# Altium PCB MAIN.PcbDoc
Units mil, origin at the board's own origin, x right, y up, seen from the top; angles counter-clockwise.
Board outline 3703.24 x 3436.36 mil, 4 copper layers (Top Layer, PWR plane, GND plane, Bottom Layer), stack 53.956 mil thick; 27 components, 25 nets, 89 pads, 24 vias.
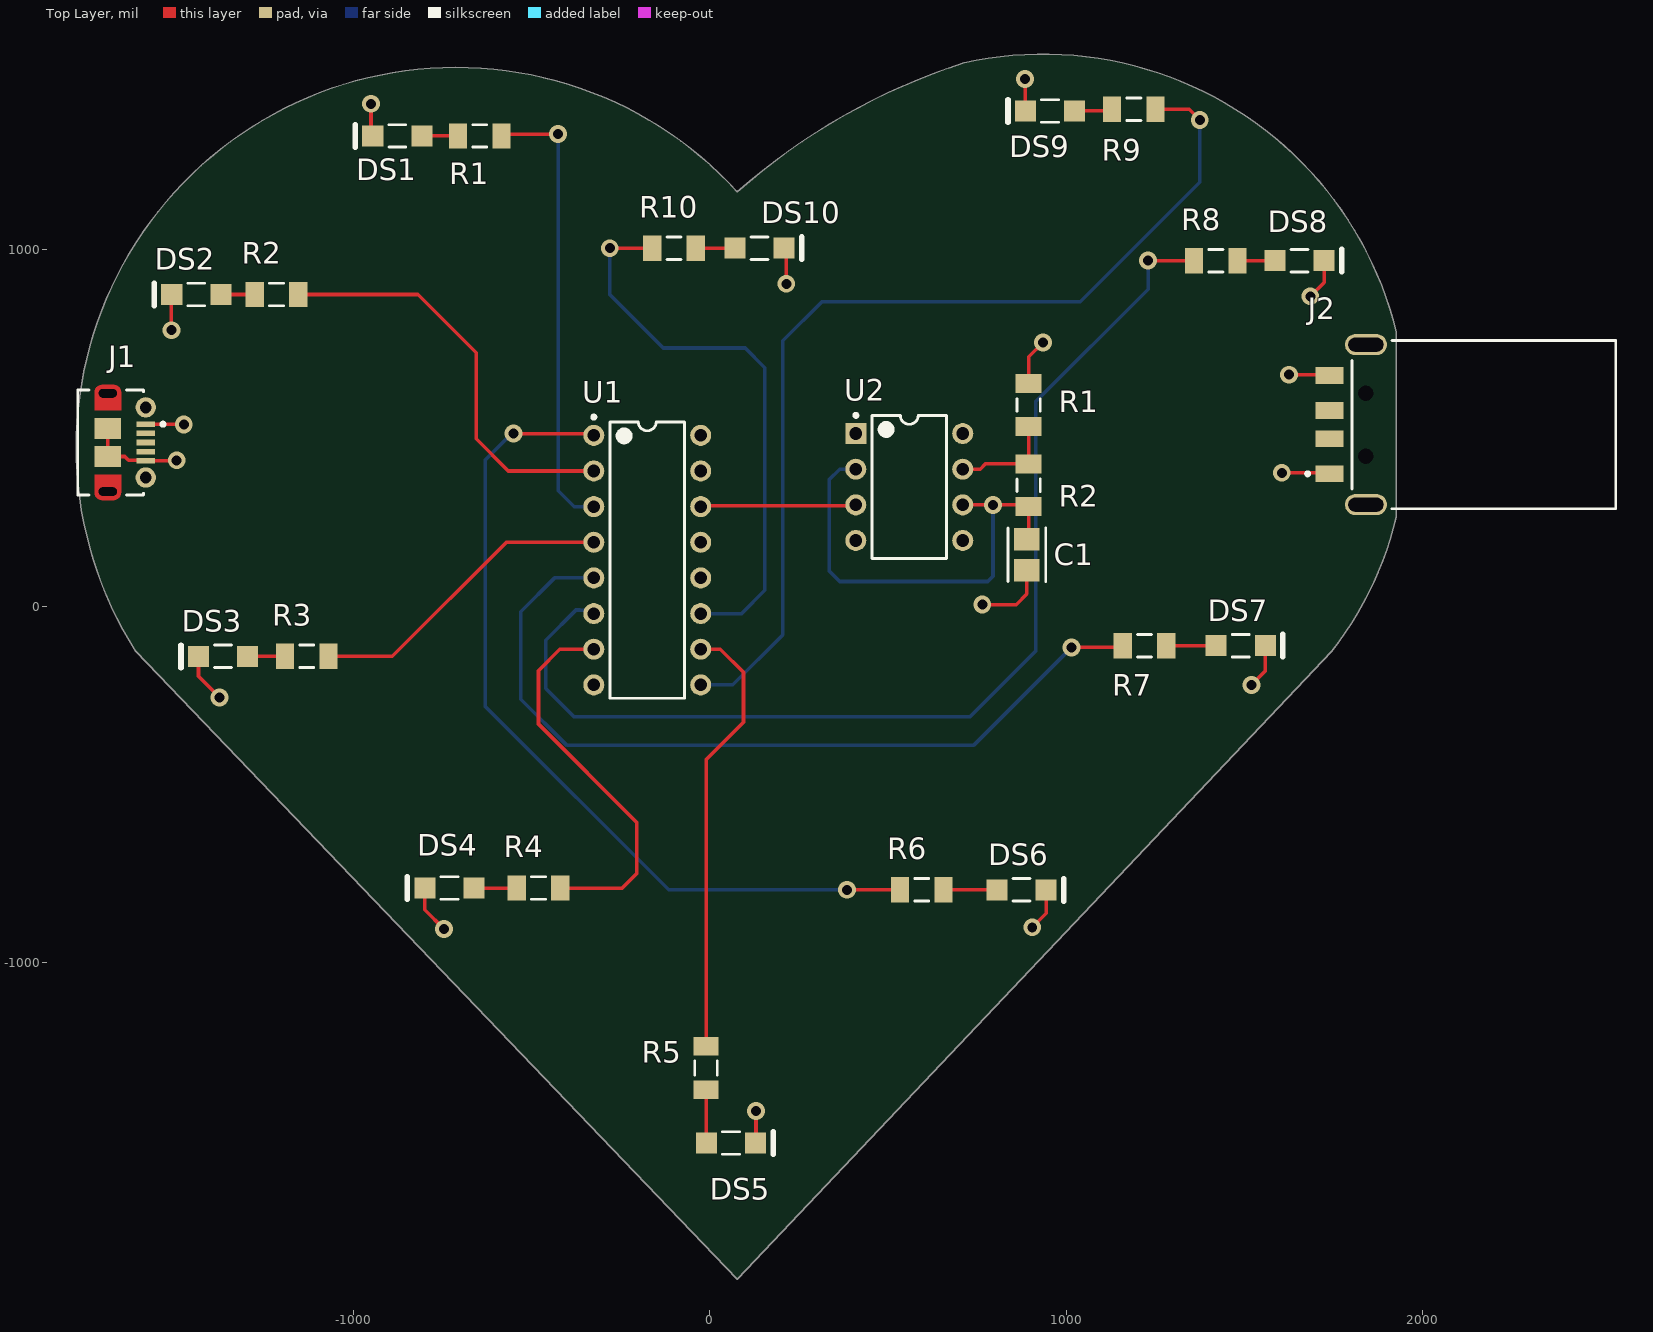
[diagram p0: Top Layer view]
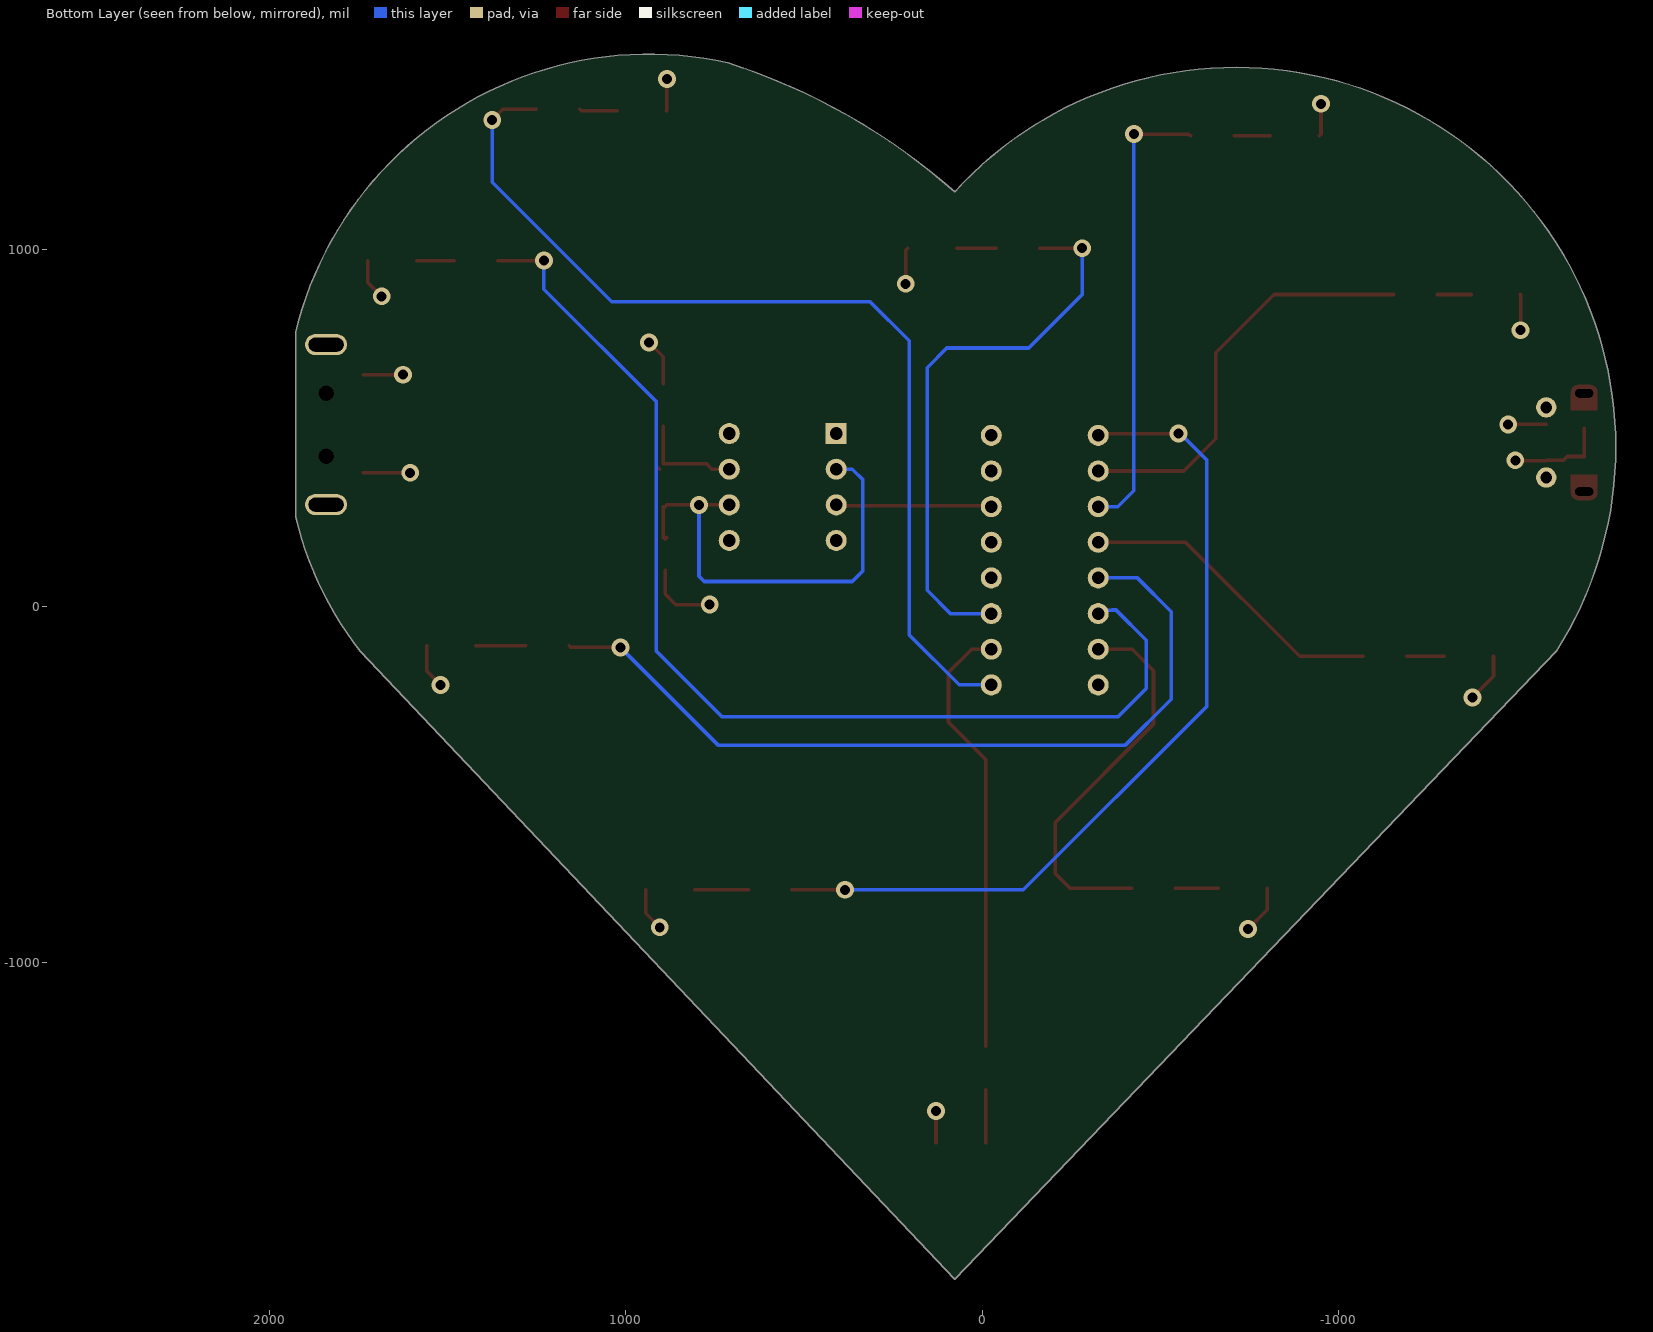
[diagram p1: Bottom Layer view, seen from below]
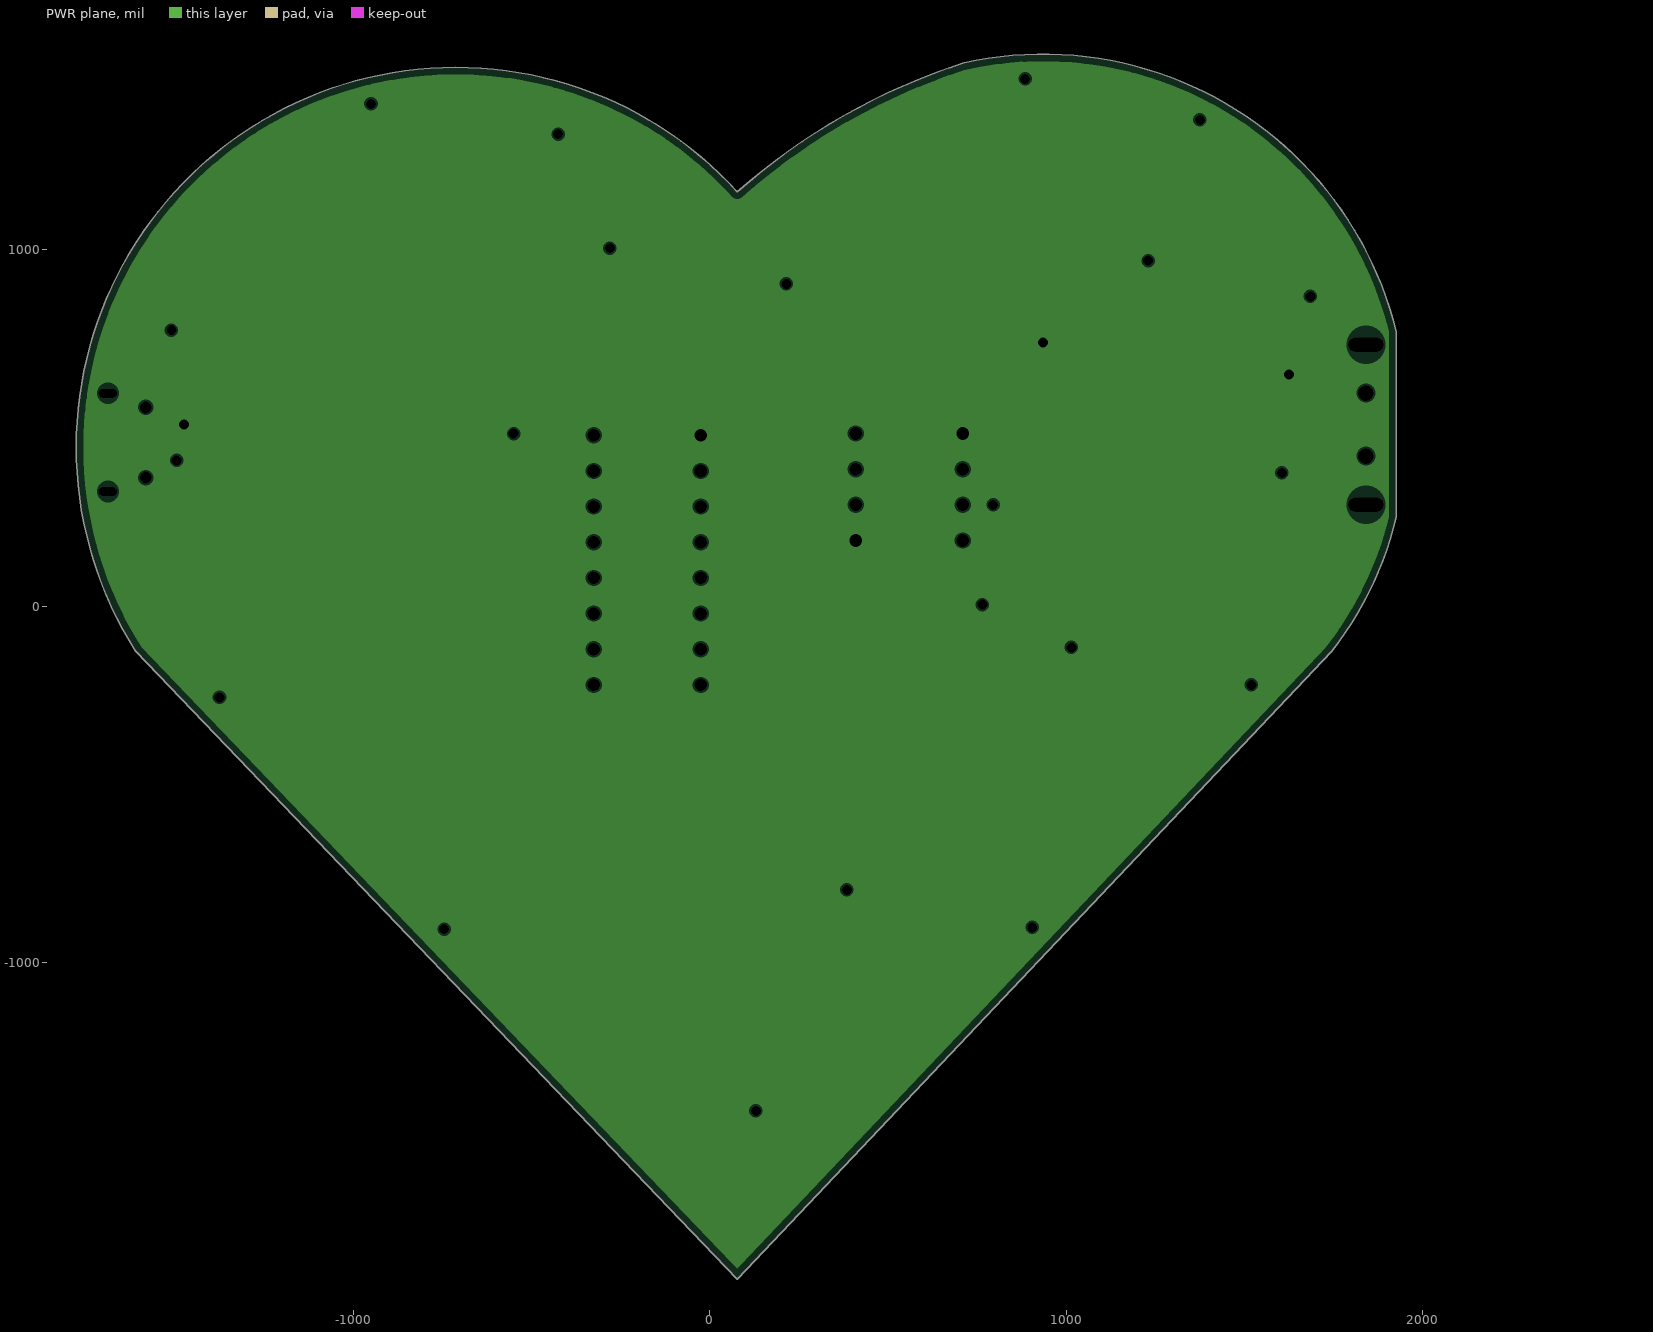
[diagram p2: PWR plane, clearances drawn from the general rule]
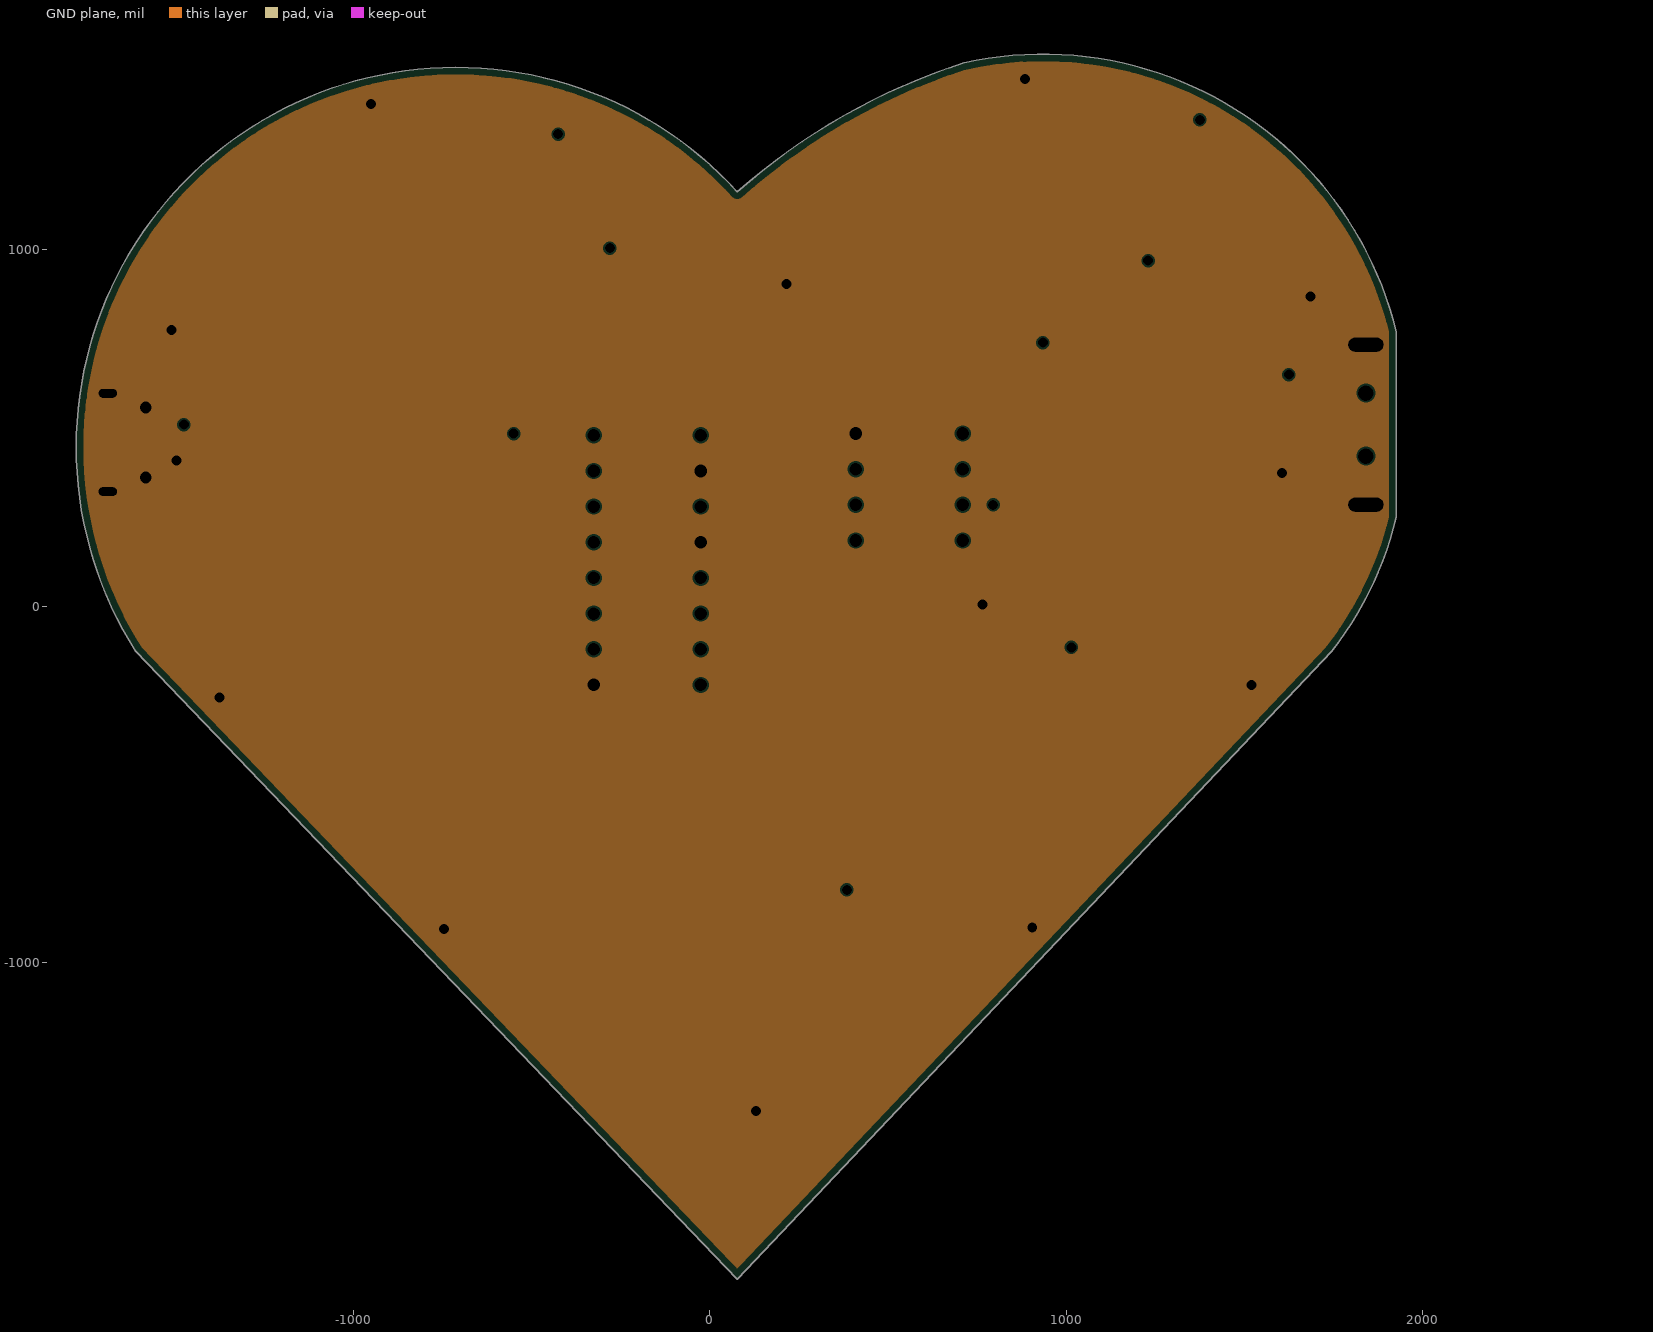
[diagram p3: GND plane, clearances drawn from the general rule]

## Layer stack, top to bottom
Top Solder: solder mask 0.4, Solder Resist, Dk 3.5
Top Layer: signal copper 1.4
Dielectric 2: prepreg 10.2, PP-006, Dk 4.1
PWR plane: plane copper 1.378, net +5
Dielectric 1: dielectric 28, FR-4, Dk 4.8
GND plane: plane copper 1.378, net GND
Dielectric 3: prepreg 10.2, PP-006, Dk 4.1
Bottom Layer: signal copper 1.4
Bottom Solder: solder mask 0.4, Solder Resist, Dk 3.5

## Board outline
1926.36,769.92 1926.36,250.67 cw(c953.75,486.38) 1745.46,-125.77 77.55,-1887.25 -1610,-125.77 cw(c-711.36,446.75) 77.55,1162.95 cw(c1255.47,-167.24) 713.97,1525 cw(c935.04,529.08)

## Design rules (kind name [scope] priority, off if disabled: settings)
BoardOutlineClearance [All] p1: gap=7.87 ignorepadtopadclearanceinfootprint=FALSE
Clearance [All] p1: gap=5 ignorepadtopadclearanceinfootprint=FALSE except(9.84: Arc-Hole Track-Hole SMDPad-Hole THPad-Hole Via-Hole Fill-Hole Poly-Hole Region-Hole Text-Hole)
ComponentClearance [All] p1: gap=5 collisioncheckmode=3 verticalgap=5 showdistances=TRUE
DiffPairsRouting [All] p1: maxlimit=10 minlimit=5 mostfreqgap=5 toplayer_minwidth=5 toplayer_maxwidth=1000 toplayer_prefwidth=5 bottomlayer_minwidth=5 bottomlayer_maxwidth=1000 bottomlayer_prefwidth=5 maxuncoupledlength=500
Height [All] p1: minheight=0 maxheight=71497.94 prefheight=500
HoleSize [All] p1: absolutevalues=TRUE maxlimit=248.03 minlimit=11.81 maxpercent=80.000 minpercent=20.000
HoleToHoleClearance [All] p1: gap=9.84 allowstackedmicrovias=FALSE
MinimumAnnularRing [All] p1: minimumring=3
MinimumSolderMaskSliver [All] p1: minsoldermaskwidth=0
PlaneClearance [All] p1: clearance=5
PlaneConnect PlaneConnectPowerPads [InPadClass('PowerPads')] p1: planeconnectstyle=Relief reliefexpansion=20 reliefentries=4 reliefconductorwidth=10 reliefairgap=10
PlaneConnect [All] p2: planeconnectstyle=Relief reliefexpansion=11.81 reliefentries=4 reliefconductorwidth=10 reliefairgap=10
PolygonConnect PolygonConnectPowerPads [All vs (InPadClass('PowerPads'))] p1: connectstyle=Direct reliefconductorwidth=10 reliefentries=4 polygonreliefangle="90 Angle" airgapwidth=10
PolygonConnect [All] p2: thpad.connectstyle=Relief thpad.reliefconductorwidth=5 thpad.reliefentries=4 thpad.polygonreliefangle="90 Angle" thpad.airgapwidth=5 smdpad.connectstyle=Relief smdpad.reliefconductorwidth=5 smdpad.reliefentries=4 smdpad.polygonreliefangle="90 Angle" smdpad.airgapwidth=5 via.connectstyle=Direct via.reliefconductorwidth=5 via.reliefentries=4 via.polygonreliefangle="90 Angle" via.airgapwidth=5
RoutingVias [All] p1: holewidth=11.81 width=23.62 viastyle="Through Hole" minholewidth=11.81 minwidth=23.62 maxholewidth=23.62 maxwidth=259.84
SilkToSilkClearance [All] p1: silktosilkclearance=0
SilkToSolderMaskClearance [IsPad] p1: minsilkscreentomaskgap=5 clearancetoexposedcopper=TRUE
SolderMaskExpansion [All] p1: expansion=2.95 istentingtop=FALSE
Width [All] p1: maxlimit=1000 minlimit=5 preferedwidth=5 minimp=50.000000 maximp=50.000000 favimp=50.000000
20 further rules are at their usual default settings.

## Classes and differential pairs
channel class LED: Designator1 Designator2 Designator3 Designator4 Designator5 Designator6 Designator7 Designator8 Designator9 Designator10
component class MAIN: C1 J1 R1 R2 U1 U2
component class Designator10: DS10 R10
component class Designator9: DS9 R9
component class Designator8: DS8 R8
component class Designator7: DS7 R7
component class Designator6: DS6 R6
component class Designator5: DS5 R5
component class Designator4: DS4 R4
component class Designator3: DS3 R3
component class Designator2: DS2
component class Designator1: DS1

## Components (designator, comment, footprint, x,y, rotation, side; value= is the part's Value field where it differs from the comment)
C1 "C3216X5R1A107M160AC" FP-C3216-160-0_3-IPC_C 890,145 r270 top
DS1 "HSMH-C150" AVAG-HSMX-C150_V -876.1,1320 r180 top (schematic designator DS?)
DS2 "HSMH-C150" AVAG-HSMX-C150_V -1440,875 r180 top (schematic designator DS?)
DS3 "HSMH-C150" AVAG-HSMX-C150_V -1365,-140 r180 top (schematic designator DS?)
DS4 "HSMH-C150" AVAG-HSMX-C150_V -730,-790 r180 top (schematic designator DS?)
DS5 "HSMH-C150" AVAG-HSMX-C150_V 60,-1505 r0 top (schematic designator DS?)
DS6 "HSMH-C150" AVAG-HSMX-C150_V 875,-795 r0 top (schematic designator DS?)
DS7 "HSMH-C150" AVAG-HSMX-C150_V 1490,-110 r0 top (schematic designator DS?)
DS8 "HSMH-C150" AVAG-HSMX-C150_V 1655,970 r0 top (schematic designator DS?)
DS9 "HSMH-C150" AVAG-HSMX-C150_V 955,1390 r180 top (schematic designator DS?)
DS10 "HSMH-C150" AVAG-HSMX-C150_V 140,1005 r0 top (schematic designator DS?)
J1 "105017-0001" USB-MICRO-B_V -1635,460 r270 top
J2 "Male USB 2.0 Connector (fixed)" MOLX-480-37-1000_V 1790,510 r90 top
R1 "CRCW1206220RFKEA" RESC3216X60X45ML10T20 -645,1320 r180 top (schematic designator R?)
R1 "CRCW12061K00FKEA" RESC3216X60X45ML15T20 895,565 r90 top (schematic designator R1?)
R2 "CRCW12061K00FKEA" RESC3216X60X45ML15T20 895,340 r90 top (schematic designator R2?)
R2 "CRCW1206220RFKEA" RESC3216X60X45ML10T20 -1215,875 r180 top (schematic designator R?)
R3 "CRCW1206220RFKEA" RESC3216X60X45ML10T20 -1130,-140 r180 top (schematic designator R?)
R4 "CRCW1206220RFKEA" RESC3216X60X45ML10T20 -480,-790 r180 top (schematic designator R?)
R5 "CRCW1206220RFKEA" RESC3216X60X45ML10T20 -10,-1295 r270 top (schematic designator R?)
R6 "CRCW1206220RFKEA" RESC3216X60X45ML10T20 595,-795 r0 top (schematic designator R?)
R7 "CRCW1206220RFKEA" RESC3216X60X45ML10T20 1220,-110 r0 top (schematic designator R?)
R8 "CRCW1206220RFKEA" RESC3216X60X45ML10T20 1420.08,970 r0 top (schematic designator R?)
R9 "CRCW1206220RFKEA" RESC3216X60X45ML10T20 1190,1395 r180 top (schematic designator R?)
R10 "CRCW1206220RFKEA" RESC3216X60X45ML10T20 -100,1005 r0 top (schematic designator R?)
U1 "CD4017BE" N0016A -175,130 r0 top (schematic designator U1?)
U2 "NE555P" P0008A 560,335 r0 top (schematic designator U?)

## Footprints (in the part's own frame and the unit in brackets; to place one, negate y for a bottom-side part, rotate by r counter-clockwise, add the part's x,y. Pads: shape width x height; smd on the part's side, far side on the other; paste and mask are expansions set on the pad)
AVAG-HSMX-C150_V [mm] "SMD, 2-Leads, Body 3.2x1.6mm"
  rect 1.5x1.5 smd: 1(-1.75,0) 2(1.75,0)
  silkscreen extent -0.6,-0.8 3,0.8, body extent -1.6,-0.8 1.6,0.8, height 1.1
FP-C3216-160-0_3-IPC_C [mil]
  rect 63.15x71.11 smd paste+0 mask+0: 1(-43.35,0) 2(43.35,0)
  silkscreen extent -75,-53 75,53, body extent -79,-41 79,41, height 10
MOLX-480-37-1000_V [mm] "CONN, 4-Leads, Body 12x18.8mm"
  rect 1.2x2 smd: 1(-3.5,1.3) 2(-1,1.3) 3(1,1.3) 4(3.5,1.3)
  oval 1.5x3 hole 1 slot 2.5 at 90 deg: 5(-5.7,-1.3) 6(5.7,-1.3)
  round 0.5 hole 1.1 unplated: MH1(-2.25,-1.3) MH2(2.25,-1.3)
  silkscreen extent -6,-19.1 6,2.97, body extent -6.35,-19.08 6.35,2.2, height 3.07
N0016A [mm] "DIP, 16-Leads, Body 19.7x6.6mm, Pitch 2.54mm"
  round 1.5 hole 0.9: 1(-3.81,8.89) 2(-3.81,6.35) 3(-3.81,3.81) 4(-3.81,1.27) 5(-3.81,-1.27) 6(-3.81,-3.81) 7(-3.81,-6.35) 8(-3.81,-8.89) 9(3.81,-8.89) 10(3.81,-6.35) 11(3.81,-3.81) 12(3.81,-1.27) 13(3.81,1.27) 14(3.81,3.81) 15(3.81,6.35) 16(3.81,8.89)
  silkscreen extent -3.93,-9.85 2.65,10.31, body extent -3.95,-9.85 3.95,9.85, height 5.08
P0008A [mm] "DIP, 8-Leads, Body 10.15x6.6mm, Pitch 2.54mm"
  rect 1.5x1.5 hole 0.9: 1(-3.81,3.81)
  round 1.5 hole 0.9: 2(-3.81,1.27) 3(-3.81,-1.27) 4(-3.81,-3.81) 5(3.81,-3.81) 6(3.81,-1.27) 7(3.81,1.27) 8(3.81,3.81)
  silkscreen extent -3.93,-5.1 2.65,5.23, body extent -3.95,-5.07 3.95,5.07, height 5.08
RESC3216X60X45ML10T20 [mm] "Chip Resistor, 2-Leads, Body 3.20x1.60mm, IPC Low Density"
  rect 1.3x1.8 smd: 1(-1.55,0) 2(1.55,0)
  silkscreen extent -0.5,-0.8 0.5,0.8, body extent -1.65,-0.85 1.65,0.85, height 0.6
RESC3216X60X45ML15T20 [mm] "Chip Resistor, 2-Leads, Body 3.3x1.75mm, IPC Low Density"
  rect 1.35x1.85 smd: 1(-1.525,0) 2(1.525,0)
  silkscreen extent -0.45,-0.82 0.45,0.82, body extent -1.65,-0.87 1.65,0.87, height 0.6
USB-MICRO-B_V [mm] "USB, MICRO B, Body 7.491x4.695 mm, Pitch 0.65 mm"
  rect 0.4x1.35 smd: 1(-1.3,1.35) 2(-0.65,1.35) 3(0,1.35) 4(0.65,1.35) 5(1.3,1.35)
  round 1.45 hole 0.85: 6(-2.5,1.35) 7(2.5,1.35)
  rrect50% 0x0 hole 0.6 slot 1.3 at 90 deg: 8(-3.5,-1.35) 11(3.5,-1.35)
  rect 1.5x1.9 smd: 9(-1,-1.35) 10(1,-1.35)
  Top Layer circle w0.5: c3.6,-0.9 r0.25
  Top Layer circle w0.5: c3.6,-1.8 r0.25
  Top Layer circle w0.5: c-3.6,-0.9 r0.25
  Top Layer circle w0.5: c-3.6,-1.8 r0.25
  Top Layer region: -2.3,-2.3 -2.3,-0.4 -3.6,-0.4 -3.6,-2.3
  Top Layer region: 2.3,-0.4 2.3,-2.3 3.6,-2.3 3.6,-0.4
  Top Layer region: 3.6,-0.9 3.6,-1.8 4.1,-1.8 4.1,-0.9
  Top Layer region: -3.6,-1.8 -3.6,-0.9 -4.1,-0.9 -4.1,-1.8
  silkscreen extent -3.75,-3.5 3.75,2.7, body extent -4.1,-3.9 4.1,1.5, height 2.67

## Part data
C1: library part CMP-2000-05396-3, "Multilayer Ceramic Capacitors 100uF ±20% 10V X5R SMD 1206", Capacitance=100uF, Case Code (Imperial)=1206, Case Code (Metric)=3216, Dielectric=X5R, Dielectric Material=Ceramic, Max Operating Temperature=85°C, Min Operating Temperature=-55°C, Package Quantity=1, Tolerance=20%, Voltage=10V, Case/Package=1206, Construction=Flat, Depth=1.6mm, Height=1.6mm, Lead Free="Lead Free", Length=3.2mm, Mount="Surface Mount", Packaging="Tape and Reel", Radiation Hardening=No, REACH SVHC="No SVHC", Resistor Type=Ceramic, RoHS Compliant=Yes, Series=C, Termination=SMD/SMT, Thickness=0.075inch, Voltage Rating=10V, Voltage Rating (DC)=10V, Weight=0.000571oz, Width=1.6mm
DS1 DS2 DS3 DS4 DS5 DS6 DS7 DS8 DS9 DS10: library part CMP-2000-06426-1, "LED Uni-Color Red, 65 mW, 25 mA, -40 to 85 degC, 2-Pin SMD, RoHS, Tape and Reel", Emitting Color=Red, Forward Current=25mA, Forward Voltage=2.6V, Manufacturer=Avago, Operating Temp Range=-40Cto85C, Operating Temperature Classification=Industrial, Package Description="2-Pin Surface Mount Device, Body 3.2 x 1.6 mm", Package Reference=HSMX-C150, Package Type=ChipLed, Power Dissipation=78W, Reverse Voltage=5V, Test Current (It)=20mA, Chip Material=GaAlAs, Datasheet URL=http://media.digikey.com/pdf/Data%20Sheets/Avago%20PDFs/HSMz-Czzz.pdf, Datasheet Version=03/2012, DELETED=Compliant, Dominant Wave Length=639nm, High Brightness=No, Lens Dimensions=2x1.6x0.6mm, Lens Type=ColorlessDiffused, Lum Intensity=17mcd, Luminous Intensity=17mcd, Main Category=ChipLED, Manufacturer URL=http://www.avagotech.com/, Mounting=SurfaceMount, Mounting Technology=SurfaceMount, Number of  Elements=1, Packaging=TapeandReel, Peak Wavelength=660nm, Pin Count=2, Product Depth (mm)=1.6mm, Product Height (mm)=1.1mm, Product Length (mm)=3.2mm, Rad Hardened=No, Shape Type=Rectangular, Type=Uni-Color, Viewing Angle=170deg
J1: library part CMP-2000-05827-1, "Micro-USB B Receptacle, Right Angle, Bottom Mount, Surface Mount, with Solder Tabs, -30 to 85 degC, 5-Pin USB, RoHS, Tape and Reel", Manufacturer=Molex, Package Description="5-Leads USB, Micro B, Body 7.5 x 5 mm, Pitch 0.65 mm", Package Reference=MICRO-B, Package Version="Rev. F, 12/2012", Standard Package=1, Voltage - Max=30V, 3D Model=105017-0001.stp, Catalog Drawings=1050170001, Category=Connectors,Interconnects, Circuits=5, Connector Type=USB-microB, Datasheet URL=http://www.molex.com/elqNow/elqRedir.htm?ref=http://www.molex.com/webdocs/datasheets/pdf/en-us/1050170001_IO_CONNECTORS.pdf, Datasheet Version=03/2016, Family=USB,DVI,HDMIConnectors, Featured Product=Micro-USBConnectorsUSBConnectors, Features=Shielded,SolderRetention, Gender=Receptacle, Ingress Protection=-, Manufacturer URL=http://www.molex.com/, Mating Products=WM17145-ND-CABLEMICROUSBBTOSTDA1.0MWM17147-ND-CABLEMICROUSBBTOSTDA2.0MWM17146-ND-CABLEMICROUSBBTOSTDA1.5M, Mounting Technology=SurfaceMount, Mounting Type=BoardCutout,SurfaceMount,RightAngle, Number of Contacts=5, Online Catalog=Molex-MicroUSB, Other Names=WM1399DKR, Package URL=http://www.molex.com/pdm_docs/sd/1050170001_sd.pdf, Packaging=Digi-Reel®, PCN Assembly/Origin=ResinSupplier21/Oct/2015, RoHS Information=1050170001CertofCompliance, Series=-, Specifications=-
J2: library part CMP-002-00073-1
R1 R2 R3 R4 R5 R6 R7 R8 R9 R10: library part CMP-2003-01956-1, Manufacturer="Vishay Dale", Part Number=CRCW1206220RFKEA
R1 R2: library part CMP-2100-03616-1, "Chip Resistor, 1 KOhm, +/- 1%, 0.25 W, -55 to 155 degC, 1206 (3216 Metric), RoHS, Tape and Reel", Case Code (Imperial)=1206, Case Code (Metric)=3216, Manufacturer="Vishay Semiconductor", Max Operating Temperature=155degC, Max Power Dissipation=250mW, Min Operating Temperature=-55degC, Package Description="2-Pin Surface Mount Device, Body 3.15 x 1.6 mm", Package Quantity=10, Package Reference=1206.0, Resistance=1KOhm, Temperature Coefficient=100ppm/degreesC, Tolerance=1%, Voltage Rating=200V, Case/Package=1206, Composition=ThickFilm, Contact Plating=Tin, Datasheet URL=http://www.farnell.com/datasheets/1720486.pdf, Datasheet Version=41061.0, Depth=1.6mm, Height=0.55mm, Lead Free=LeadFree, Length=3.2mm, Manufacturer URL=http://www.vishay.com/, Military Standard=Not, Mount=SurfaceMount, Number of Pins=2, Number of Terminations=2, Packaging=TapeandReel, Power Rating=250mW, Radiation Hardening=No, REACH SVHC=Unknown, RoHSCompliant=true, Termination=SMD/SMT, Voltage Rating (DC)=200V, Weight=0.000353oz, Width=0.063inch
U1: library part CMP-1623-00541-2, "CMOS Decade Counter with 10 Decoded Outputs, N0016A, TUBE", F @ Nom Voltage(Max)(Mhz)=8, Generic Part Number=CD4017B, ICC @ Nom Voltage(Max)(mA)=0.03, Manufacturer="Texas Instruments", Operating Temperature Range(C)="-55 to 125", Rating=Military, tpd @ Nom Voltage(Max)(ns)=270, Voltage(Nom)(V)=10, Bits(#)=10, Code_JEDEC=MS-001, DatasheetVersion=SCHS027C, Function=Counter, Input Type=CMOS, Inputs=1, Output Drive (IOL/IOH)(Max)(mA)=1.5/-1.5, Output Type=CMOS, PackageReference=N0016A, Schmitt Trigger=No, Technology Family=CD4000, Type=Decade, VCC(Max)(V)=18, VCC(Min)(V)=3
U2: library part CMP-2000-04954-1, "Precision Timer, 4.5 to 16 V, 0 to 70 degC, 8-Pin DIP, Pb-Free, Tube", Manufacturer=TexasInstruments, Maximum High Level Output Current=-200mA, Maximum Low Level Output Current=200mA, Operating Supply Voltage=5, Package=8PDIP, Package Description="8-Pin Double In-line Package, Body 9.59 x 6.35 mm, Pitch 2.54 mm", Package Reference=P8, Category=Timer, Datasheet URL=http://www.ti.com/general/docs/lit/getliterature.tsp?genericPartNumber=NE555&fileType=pdf, Datasheet Version="Rev. I, 09/2014", Manufacturer URL=http://www.ti.com/, Number of Internal Timers=1, Package URL=http://www.ti.com/lit/ml/mpdi001b/mpdi001b.pdf, Packaging=Rail/Tube, Rad Hard=No, Type=Standard

## Via types
v1: diameter 50, hole 28, Top Layer to Bottom Layer, 24 vias

## Nets (pads, with @x,y where several pads share a name; then routed paths per layer and width w, separated by ;. In a path a pad name is that pad's centre, name@x,y a point inside that pad or via, vN(x,y) a via of type N, cw(c..) or ccw(c..) an arc to the next point about the centre after c; other vN are vias at no path point)
+5: J1.1 J2.4 R1.2@895,625.04 U1.16 U2.4 U2.8 | length 352.1
  Top Layer w5: J2.4@1736.26,650 J2.4@1737.64,651.38
  Top Layer w10: J1.1 -1581.26,510.59 -1475.59,510.59 v1(-1475,510) ; R1.2@895,625.04 895,700 v1(935,740) ; v1(1625,650) J2.4@1736.26,650
CLK: U1.14 U2.3 | length 437.1
  Top Layer w10: U1.14 -22.5,282.5 407.5,282.5 U2.3
GND: C1.2 DS1.2 DS2.2 DS3.2 DS4.2 DS5.2 DS6.2 DS7.2 DS8.2 DS9.2 DS10.2 J1.5 J1.6 J1.7 J1.8 J1.9 J1.10 J1.11 J2.1 J2.5 J2.6 U1.8 U1.13 U1.15 U2.1 | length 1736.7
  Top Layer w5: J1.5@-1583.03,410 J1.5 ; J2.1@1736.85,375 J2.1@1737.64,375.79
  Top Layer w10: J1.9 J1.10 -1640.63,420.63 -1630,410 J1.5@-1583.03,410 ; J1.5 -1496.18,408.82 v1(-1495,410) ; v1(-1510,775) -1510,873.9 DS2.2 ; DS3.2 -1433.9,-196.1 v1(-1375,-255) ; v1(-950,1410) -950,1325 DS1.2 ; DS4.2 -798.9,-851.1 v1(-745,-905) ; U1.8@-329.53,-224.53 U1.8 ; DS5.2 130,-1503.9 v1(130,-1415) ; DS10.2 215,998.9 v1(215,905) ; v1(765,5) 860,5 890,35 C1.2 ; v1(885,1480) 885,1391.1 DS9.2 ; v1(905,-900) 943.9,-861.1 DS6.2 ; v1(1520,-220) 1558.9,-181.1 DS7.2 ; v1(1605,375) J2.1@1736.85,375 ; v1(1685,870) 1723.9,908.9 DS8.2
LED_1: R1.1@-583.98,1320 U1.3 | length 1279.7
  Top Layer w10: R1.1@-583.98,1320 -578.98,1325 v1(-425,1325)
  Bottom Layer w10: v1(-425,1325) -425,325 -380,280 U1.3
LED_2: R2.1@-1153.98,875 U1.2 | length 1176.3
  Top Layer w10: R2.1@-1153.98,875 -820,875 -819.14,875.86 -655,711.72 -655,470 -565,380 U1.2
LED_3: R3.1 U1.4 | length 876.5
  Top Layer w10: R3.1 -890,-140 -570,180 U1.4
LED_4: R4.1 U1.7 | length 1094.3
  Top Layer w10: R4.1 -245,-790 -205,-750 -205,-605 -480,-330 -480,-180 -420,-120 U1.7
LED_5: R5.1 U1.10 | length 1239.4
  Top Layer w10: U1.10 30,-120 95,-185 95,-325 -10,-430 R5.1
LED_6: R6.1 U1.1 | length 2400.4
  Top Layer w10: v1(-550,485) -330,485 U1.1 ; v1(385,-795) R6.1
  Bottom Layer w10: v1@-555,485 -630,410 -630,-280 -115,-795 v1(385,-795)
LED_7: R7.1 U1.5 | length 2348.2
  Top Layer w10: v1(1015,-115) 1153.98,-115 R7.1
  Bottom Layer w10: U1.5 -435,80 -530,-15 -530,-260 -400,-390 740,-390 v1(1015,-115)
LED_8: R8.1 U1.6 | length 3148.6
  Top Layer w10: v1(1230,970) R8.1
  Bottom Layer w10: U1.6 -334.39,-10.61 -364.39,-10.61 -365,-10 -375,-10 -460,-95 -460,-230 -380,-310 730,-310 915,-125 915,575 1230,890 v1(1230,970)
LED_9: R9.1 U1.9 | length 2778.7
  Top Layer w10: R9.1 1345,1395 v1(1375,1365)
  Bottom Layer w10: U1.9 65,-220 205,-80 205,745 315,855 1040,855 1375,1190 v1(1375,1365)
LED_10: R10.1 U1.11 | length 1600.8
  Top Layer w10: v1(-280,1005) R10.1
  Bottom Layer w10: v1(-280,1005) -280,875 -130,725 100,725 155,670 155,45 90,-20 U1.11
NetC1_1: C1.1 R2.1@895,279.96 U2.2 U2.6 | length 1307.5
  Top Layer w5: C1.1 C1.1@895,193.35
  Top Layer w10: U2.6 v1(795,285) 885,285 R2.1@892.52,277.48 ; C1.1@885,193.35 C1.1 ; C1.1@895,193.35 R2.1@895,279.96
  Bottom Layer w10: U2.2 365,385 335,355 335,100 365,70 780,70 795,85 v1(795,285)
NetDS?_Designator1_1: DS1.1 R1.2@-706.02,1320 | length 101.2
  Top Layer w10: DS1.1 R1.2@-706.02,1320
NetDS?_Designator2_1: DS2.1 R2.2@-1276.02,875 | length 95.1
  Top Layer w10: DS2.1 R2.2@-1276.02,875
NetDS?_Designator3_1: DS3.1 R3.2 | length 105.1
  Top Layer w10: DS3.1 R3.2
NetDS?_Designator4_1: DS4.1 R4.2 | length 120.1
  Top Layer w10: DS4.1 R4.2
NetDS?_Designator5_1: DS5.1 R5.2 | length 149.4
  Top Layer w10: R5.2 -10,-1503.9 DS5.1
NetDS?_Designator6_1: DS6.1 R6.2 | length 150.1
  Top Layer w10: R6.2 DS6.1
NetDS?_Designator7_1: DS7.1 R7.2 | length 140.1
  Top Layer w10: R7.2 DS7.1
NetDS?_Designator8_1: DS8.1 R8.2 | length 105
  Top Layer w10: R8.2 DS8.1
NetDS?_Designator9_1: DS9.1 R9.2 | length 107.1
  Top Layer w10: DS9.1 1123.98,1390 R9.2
NetDS?_Designator10_1: DS10.1 R10.2 | length 110.1
  Top Layer w10: R10.2 DS10.1
NetR1_1: R1.1@895,504.96 R2.2@895,400.04 U2.7 | length 310.3
  Top Layer w10: U2.7 758.72,385 773.72,400 R2.2@895,400 ; R2.2@895,400.04 R1.1@895,504.96 ; R2.2@904.9,385 R2.2@914.93,395.04
pads on no net: J1.2 J1.3 J1.4 J2.2 J2.3 J2.MH1 J2.MH2 U1.12 U2.5
copper on no net: | length 3
  Top Layer w10: -3155,760 ccw(c-3155,770) -3152.05,760.44

## Polygon pours and split planes (outlines as drawn)
+5 on PWR plane (split plane): 221 vertices, not listed, extent -1756.88,-1858.11 1906.26,1529.24
GND on GND plane (split plane): 221 vertices, not listed, extent -1756.88,-1858.11 1906.26,1529.24

## Text inside footprints (layer, text, board x,y; h text height)
J1: Mechanical 1 "PCB EDGE" at -1749.17,743.46 h11.81 r270
J2: Mechanical 1 "PCB EDGE" at 1941.18,560 h19.68 r90